# EAGLE board 3DR-Radio-USB (EAGLE 6.2)
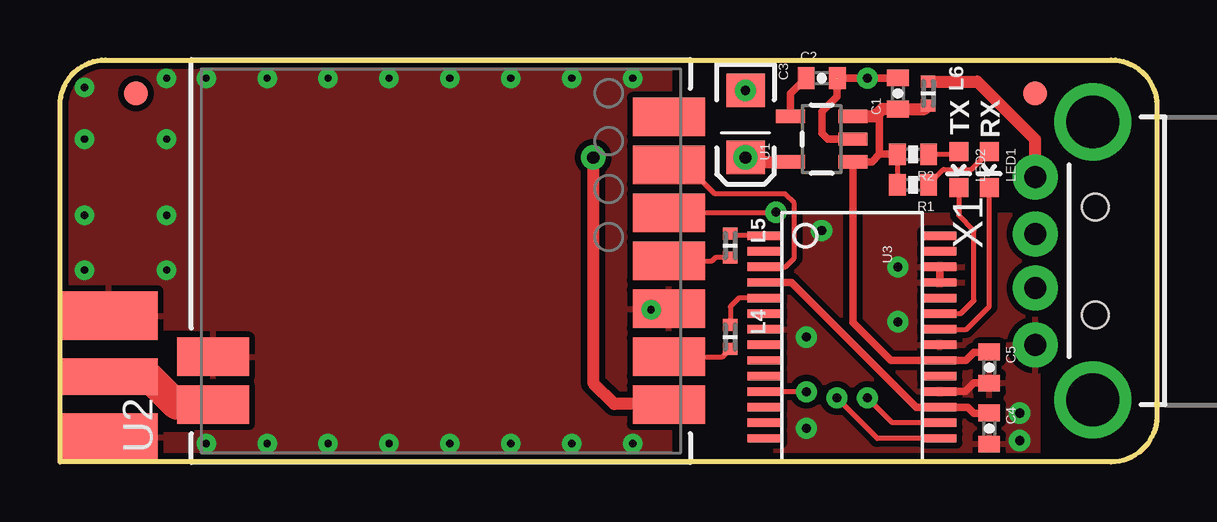
[diagram p0: board, top side]
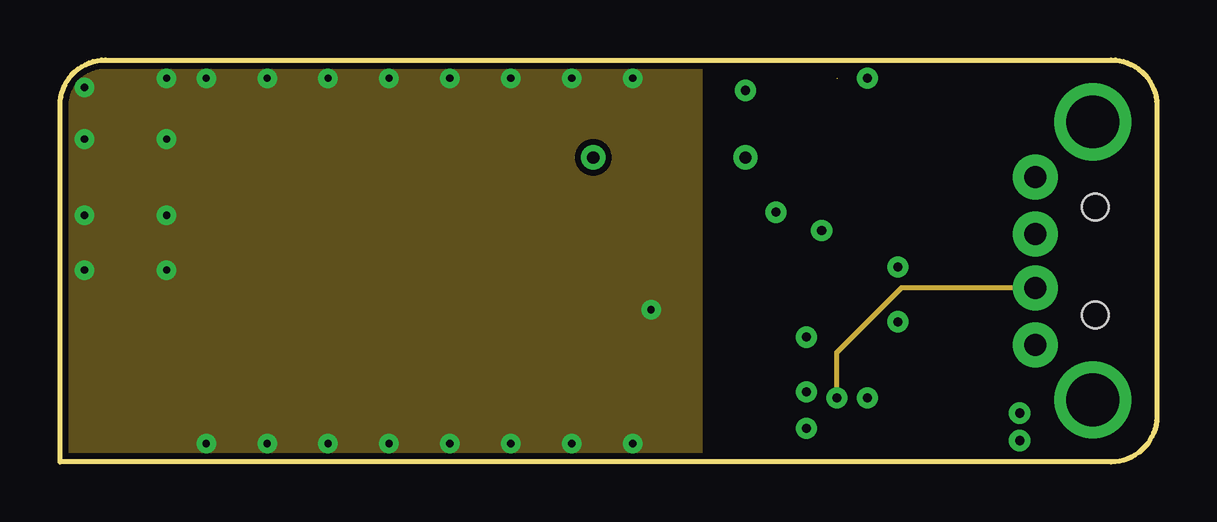
[diagram p1: board, inner layer Route2]
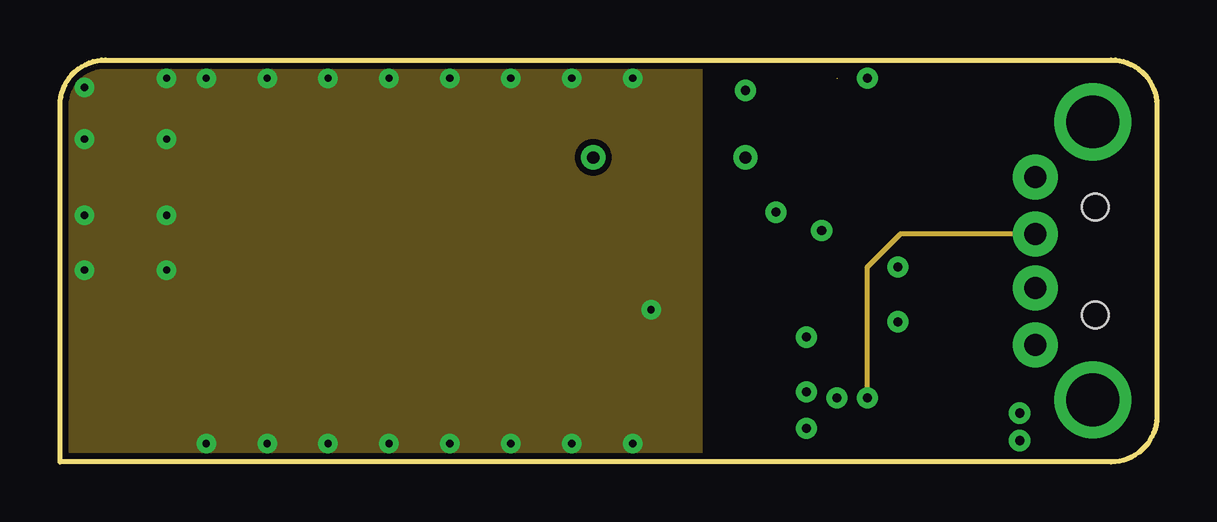
[diagram p2: board, inner layer Route15]
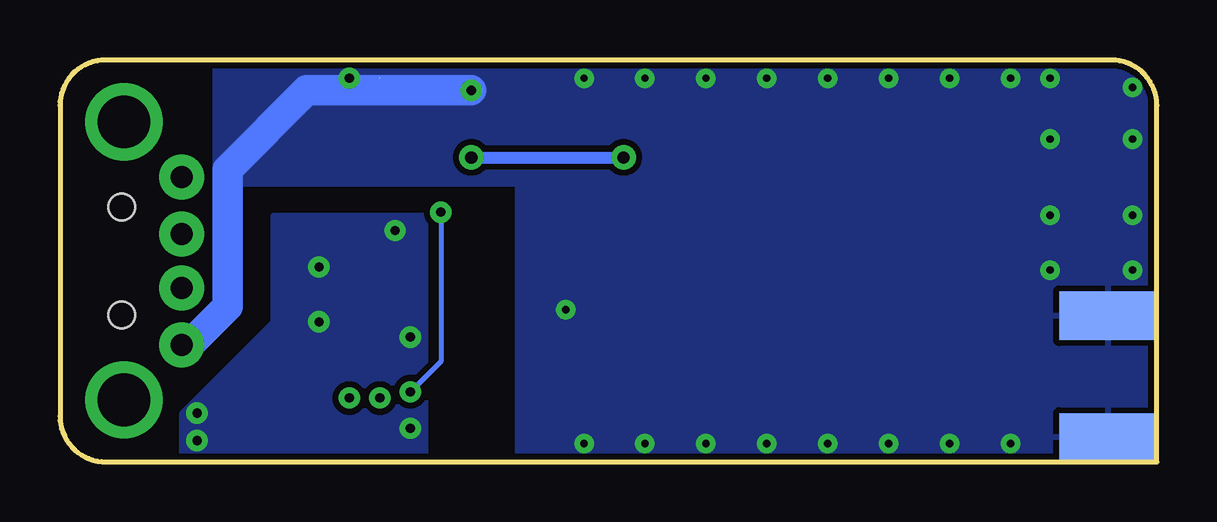
[diagram p3: board, bottom side, seen from below]

Size 45.72 x 16.76 mm. Coordinates in mm from the lower left corner, seen from the top.
Outline: 0,0 0,14.86 arc-90 1.91,16.76 43.81,16.76 arc-90 45.72,14.86 45.72,1.9 arc-90 43.81,0 0,0
Copper layers (1*2*15*16): Top 0.035mm / dielectric 0.5mm / Route2 0.035mm / dielectric 0.5mm / Route15 0.035mm / dielectric 0.5mm / Bottom 0.035mm
Design rules: minimum track width 7mil, minimum drill 10mil, track to track 7mil, track to pad 7mil, pad to pad 7mil, via to via 7mil, smd to smd 0mil, copper to edge 10mil, drill to drill 8mil, minimum pad ring 12mil, minimum via ring 10mil, stop-mask expansion 4mil, vias tented up to drill 25mil, thermal gap 10mil

## Footprints (pad centres in the part's own frame; a part is rotated, then mirrored left to right if it is on the bottom)
0402-CAP = smd 0.7 x 0.9: 1 -0.65,0; 2 0.65,0
EIA3216 = smd 1.4 x 1.6: A 1.4,0; C -1.4,0
SMA-EDGE = smd 2.032 x 4.064: GND@0 -2.54,0; GND@1 2.54,0 | smd 2.032 x 4.064 bottom: GND@2 -2.54,0; GND@3 2.54,0 | smd 1.524 x 4.064: SIG 0,0
FIDUCIAL-1X2 = smd 1 x 1: 1 0,0
0402-IND = smd 0.5 x 0.6: P$1 -0.5,0; P$2 0.5,0
LED-0603 = smd 0.8 x 0.8: A 0,-0.75; C 0,0.75
0402-RES = smd 0.7 x 0.9: 1 -0.65,0; 2 0.65,0
SOT23-5 = smd 0.55 x 1.2: 1 -0.95,-1.3; 2 0,-1.3; 3 0.95,-1.3; 4 0.95,1.3; 5 -0.95,1.3
HM-TRP-SMD = smd 1.6 x 3: !CONFIG 2,-9.5; !ENABLE 4,-9.5; AGND -4,9.5; ANT -6,9.5; DRX 0,-9.5; DTX -4,-9.5; GND -2,-9.5; TEST 6,-9.5; VCC -6,-9.5
SSOP28DB = smd 0.348 x 1.397: 1 -4.225,-3.656; 2 -3.575,-3.656; 3 -2.925,-3.656; 4 -2.275,-3.656; 5 -1.625,-3.656; 6 -0.975,-3.656; 7 -0.325,-3.656; 8 0.325,-3.656; 9 0.975,-3.656; 10 1.625,-3.656; 11 2.275,-3.656; 12 2.925,-3.656; 13 3.575,-3.656; 14 4.225,-3.656; 15 4.225,3.656; 16 3.575,3.656; 17 2.925,3.656; 18 2.275,3.656; 19 1.625,3.656; 20 0.975,3.656; 21 0.325,3.656; 22 -0.325,3.656; 23 -0.975,3.656; 24 -1.625,3.656; 25 -2.275,3.656; 26 -2.925,3.656; 27 -3.575,3.656; 28 -4.225,3.656
USB-A-H = drill 0.914 pad 1.88: D+ 2.4,1.127; D- 2.4,-1.127; GND 2.4,3.5; VBUS 2.4,-3.5 | drill 2.2: GND2 0,-5.8; GND3 0,5.8 | hole 1.1: -0.1,2.25; -0.1,-2.25

## Placement (x,y rotation side)
C1  1uF  [0402-CAP]  34.92,15.37 90 top
C2  470pF  [0402-CAP]  31.75,16 0 top
C3  10uF  [EIA3216]  28.57,14.1 270 top
C4  0.1uF  [0402-CAP]  38.73,1.4 270 top
C5  0.1uF  [0402-CAP]  38.73,3.94 270 top
J$1  SMA_EDGE  [SMA-EDGE]  2.03,3.56 90 top
JP1  FIDUCIAL1X2  [FIDUCIAL-1X2]  40.64,15.37 0 top
JP2  FIDUCIAL1X2  [FIDUCIAL-1X2]  3.17,15.37 0 top
L4  BLM15HD102SN1  [0402-IND]  27.94,5.21 270 top
L5  BLM15HD102SN1  [0402-IND]  27.94,9.02 270 top
L6  BKP1005HS121-T  [0402-IND]  36.2,15.37 270 top
LED1  GREEN  [LED-0603]  38.73,12.19 180 top
LED2  RED  [LED-0603]  37.47,12.19 180 top
R1  330  [0402-RES]  35.56,11.56 180 top
R2  330  [0402-RES]  35.56,12.83 180 top
U1  MIC5219-3.3V  [SOT23-5]  31.75,13.46 90 top
U2  [HM-TRP-SMD]  15.88,8.38 90 top
U3  FT232RL-BASICSSOP  [SSOP28DB]  33.02,5.21 270 top
X1  USB-A-H  [USB-A-H]  43.05,8.38 180 top

## Library data of the parts
C1-C5 JP1 JP2 LED1 LED2 R1 R2 U1 U3 X1 = SparkFun
J$1 U2 = 3DRobotics
L4-L6 = pel_dipol_comp

## Nets
3.3V: C3.A U1.5 U2.VCC
5V: C1.1 C5.1 L6.P$2 R1.2 R2.2 U1.1 U1.3 U3.20
CTS: U2.!CONFIG U3.11
DTR: U3.2
GND: C1.2 C2.2 C3.C C4.2 C5.2 J$1.GND@0 J$1.GND@1 J$1.GND@2 J$1.GND@3 U1.2 U2.AGND U2.GND U3.7 U3.18 U3.21 U3.25 U3.26 X1.GND
N$1: J$1.SIG U2.ANT
N$2: C2.1 U1.4
N$3: C4.1 U3.4 U3.17
N$4: L4.P$2 U2.DTX
N$5: U3.15 X1.D+
N$6: U3.16 X1.D-
N$7: L5.P$2 U2.DRX
N$8: LED2.A R2.1
N$9: LED1.A R1.1
N$10: LED2.C U3.23
N$11: LED1.C U3.22
N$12: L6.P$1 X1.VBUS
RTS: U2.!ENABLE U3.3
RX: L5.P$1 U3.1
TX: L4.P$1 U3.5

## Tracks (layer width: path | path; a pad name or v marks a point on that pad's centre or on a via)
3.3V  (via drill 0.51)
  Top 0.508: U2.VCC 25.41,2.41 23.11,2.41 22.23,3.3 v22.23,12.7 | U1.5 29.39,12.51 C3.A
  Bottom 0.508: C3.A v22.23,12.7
  other vias: 28.57,12.7
5V
  Top 0.203: R2.2 R1.2
  Top 0.305: C5.1 38.72,4.57 38.1,4.57 37.76,4.23 U3.20 34.63,4.23 33.05,5.81 U1.1 33.85,12.51 34.16,12.83 | 34.16,12.83 34.16,14.73 34.91,14.73 C1.1 | R2.2 34.16,12.83
  Top 0.508: U1.3 33.97,14.41 34.27,14.72 C1.1 36.05,14.72 L6.P$2
CTS  (via drill 0.38)
  Top 0.203: U2.!CONFIG 29.81,10.38 v29.84,10.41 | U3.11 v31.1,2.93 v31.11,2.92
  Bottom 0.203: v29.84,10.41 29.84,4.19 v31.11,2.92
GND  (via drill 0.3, 0.38)  (1 unrouted)
  Top 0.305: U3.18 37.73,2.93 38.1,3.3 C5.2 | U3.25 U3.26 | U1.2 32,13.46 31.75,13.72 31.75,14.61 32.38,15.24 32.38,16 v33.66,16 C1.2 | C3.C
  Bottom 0.305: v33.66,16 34.04,16 34.29,15.75
  Bottom 1.27: C3.C 35.43,15.49 38.73,12.19 38.73,6.48 40.33,4.88 X1.GND
  other vias: 1.02,15.62 4.45,16 6.1,16 8.64,16 11.18,16 13.72,16 16.26,16 18.8,16 21.34,16 1.02,10.29 1.02,13.46 1.02,8 4.45,8 4.45,10.29 4.45,13.46 6.1,0.76 8.64,0.76 11.18,0.76 13.72,0.76 16.26,0.76 18.8,0.76 21.34,0.76 24.64,6.35 23.88,16 23.88,0.76 34.92,8.13 31.11,5.21 34.92,5.84 31.75,9.65 31.11,1.4 40.01,2.03 40.01,0.89 28.57,15.49
  pour Top (isolate 0.254): 5.71,-1.14 5.71,19.18 25.4,19.18 25.4,-1.14
  pour Bottom (isolate 0.254): 5.71,-1.14 5.71,20.45 26.67,20.45 26.67,-1.14
  pour Top (isolate 0.254): 5.71,-1.14 -0.64,-1.14 -0.64,1.14 5.71,1.14
  pour Top (isolate 0.254): -0.64,5.59 5.71,5.59 5.71,17.91 -0.64,17.91
  pour Bottom (isolate 0.254): 5.71,17.91 -1.27,17.91 -1.27,4.83 5.84,4.83
  pour Bottom (isolate 0.254): -1.27,-1.14 -1.27,5.46 5.71,5.46 5.71,-1.14
  pour Route2 (isolate 0.254): 0,-0.51 0,21.08 26.67,20.45 26.67,-1.14
  pour Route15 (isolate 0.254): 0,-0.51 0,22.35 26.67,22.35 26.67,-0.51
  pour Top (isolate 0.254): 29.84,-1.78 29.84,10.29 40.77,10.29 40.77,-1.78
  pour Bottom (isolate 0.254): 40.64,-2.41 40.64,2.03 36.83,5.84 36.83,10.29 30.48,10.29 30.48,-2.41
  pour Bottom (isolate 0.254): 26.67,19.18 26.67,11.56 39.24,11.56 39.24,19.18
N$1
  Top 1.219: J$1.SIG 3.68,3.56 4.86,2.38 U2.ANT
N$2
  Top 0.305: U1.4 30.45,15.35 C2.1
N$3
  Top 0.305: U3.4 30.49,7.48 35.69,2.28 U3.17 37.85,2.28 38.1,2.03 38.72,2.03 C4.1
N$4
  Top 0.203: U2.DTX 27.61,4.38 L4.P$2
N$5  (via drill 0.38)
  Top 0.203: U3.15 34.07,0.98 v32.38,2.67
  Route2 0.203: v32.38,2.67 32.38,4.57 35.07,7.25 X1.D+
N$6  (via drill 0.38)
  Top 0.203: U3.16 34.69,1.63 v33.66,2.67
  Route15 0.203: v33.66,2.67 33.66,8.13 35.04,9.51 X1.D-
N$7
  Top 0.203: U2.DRX 27.18,8.38 27.31,8.52 L5.P$2
N$8
  Top 0.203: R2.1 37.35,12.83 LED2.A
N$9
  Top 0.203: R1.1 36.21,11.57 36.83,12.19 37.98,12.19 LED1.A
N$10
  Top 0.203: U3.23 37.55,6.18 38.1,6.73 38.1,9.65 37.47,10.29 LED2.C
N$11
  Top 0.203: U3.22 37.79,5.53 38.73,6.48 LED1.C
N$12
  Top 0.508: X1.VBUS 40.65,13.45 38.23,15.87 L6.P$1
RTS
  Top 0.203: U2.!ENABLE 26.1,12.38 27.3,11.18 30.23,11.18 30.61,10.8 30.61,8.51 30.23,8.13 U3.3
RX
  Top 0.203: U3.1 28.02,9.43 L5.P$1
TX
  Top 0.203: U3.5 28.3,6.83 27.94,6.48 L4.P$1

## Text on the board
tPlace: TX | RX